# EAGLE board MM-Qwiic-Snap (EAGLE 9.6.2)
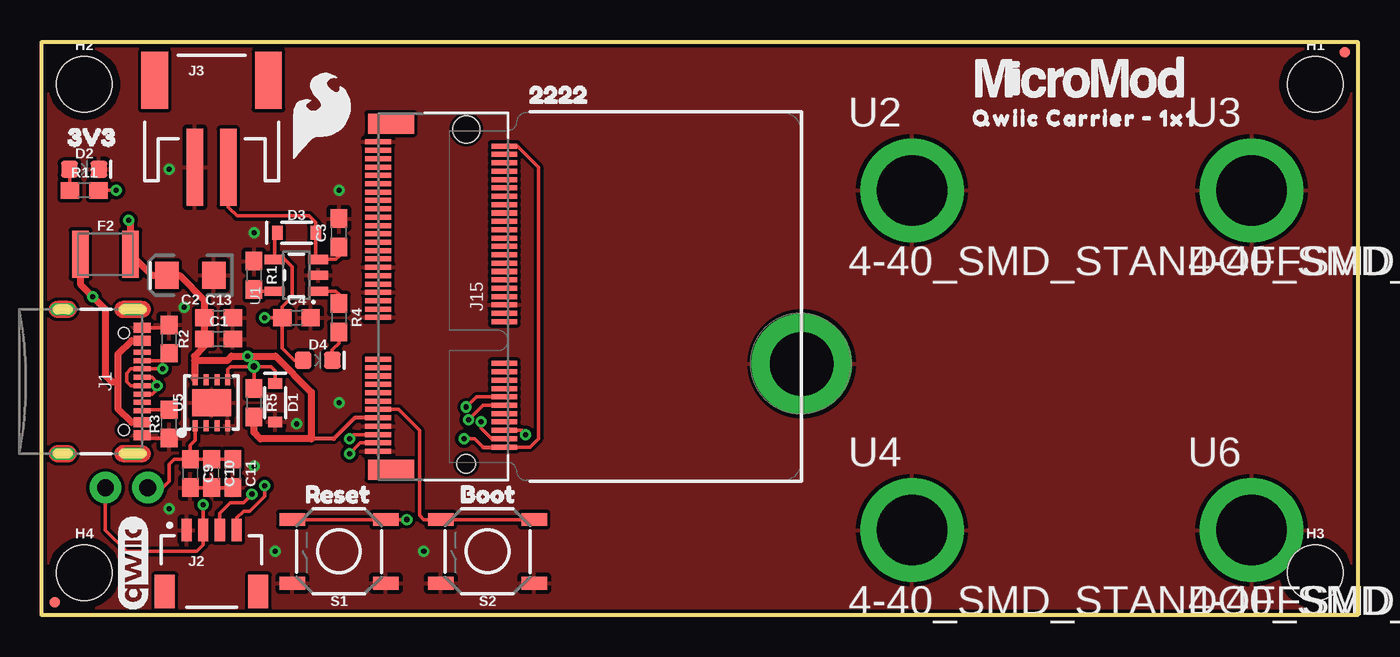
[diagram p0: board, top side]
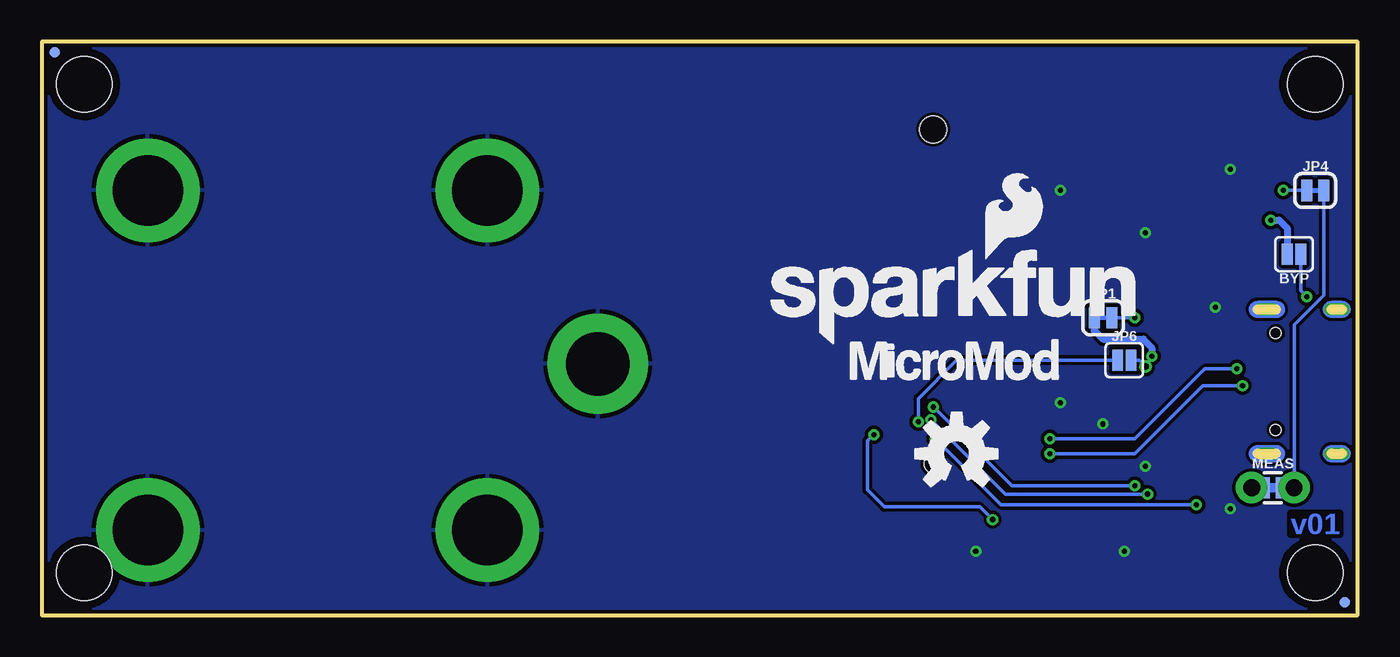
[diagram p1: board, bottom side, seen from below]

Size 78.74 x 34.29 mm. Coordinates in mm from the lower left corner, seen from the top.
Outline: 0,0 0,34.29 78.74,34.29 78.74,0 0,0
Copper layers (1*16): Top 0.035mm / dielectric 1.5mm / Bottom 0.035mm
Design rules "SparkFun-2-layer-TIGHT": minimum track width 7mil, minimum drill 15mil, track to track 7mil, track to pad 7mil, pad to pad 7mil, via to via 7mil, smd to smd 7mil, copper to edge 7mil, drill to drill 7mil, minimum pad ring 7mil, minimum via ring 7mil, stop-mask expansion 4mil, vias tented up to drill 25mil, thermal gap 10mil
Net classes: 0 default: width 0 mm, drill 0 mm; 1 power: width 0.762 mm
tRestrict: 4 lines

## Footprints (pad centres in the part's own frame; a part is rotated, then mirrored left to right if it is on the bottom)
SMT-JUMPER_2_NO_SILK = smd 0.635 x 1.27: 1 -0.406,0; 2 0.406,0
0603 = smd 1.1 x 1: 1 -0.85,0; 2 0.85,0
EIA3216 = smd 1.4 x 1.6: + 1.4,0; - -1.4,0
SOD-323 = smd 0.63 x 0.83: A 1.15,0; C -1.15,0
LED-0603 = smd 1 x 1: A -0.877,0; C 0.877,0
1210 = smd 1 x 2.8: 1 -1.5,0; 2 1.5,0
FIDUCIAL-MICRO = smd 0.635 x 0.635: 1 0,0
STAND-OFF = hole 3.302: 0,0
STAND-OFF-REFLOW-M2.5 = drill 3.8 pad 6: 1 0,0
USB-C-16P-2LAYER-PADS = smd 0.3 x 1: A5 -1.25,-0.34; A6 -0.25,-0.34; A7 0.25,-0.34; A8 1.25,-0.34; B5 1.75,-0.34; B6 0.75,-0.34; B7 -0.75,-0.34; B8 -1.75,-0.34 | smd 0.6 x 1: GND -3.225,-0.34; GND2 3.225,-0.34; VBUS1 -2.45,-0.34; VBUS2 2.45,-0.34 | drill 0.4 pad 0.6 long: SHLD1 -4.318,-0.915; SHLD2 4.318,-0.915; SHLD3 -4.318,-5.095; SHLD4 4.318,-5.095 | hole 0.65: -2.89,-1.445; 2.89,-1.445
JST04_1MM_RA = smd 0.6 x 1.35: 1 -1.5,0; 2 -0.5,0; 3 0.5,0; 4 1.5,0 | smd 1.2 x 2: NC1 2.8,-3.675; NC2 -2.8,-3.675
JST-2-SMD = smd 1 x 4.6: 1 -1,-3.7; 2 1,-3.7 | smd 1.6 x 3.4: NC1 -3.4,1.5; NC2 3.4,1.5
M.2-CONNECTOR-E = smd 0.3 x 1.55: 1 9.25,-5.275; 2 9,2.275; 3 8.75,-5.275; 4 8.5,2.275; 5 8.25,-5.275; 6 8,2.275; 7 7.75,-5.275; 8 7.5,2.275; 9 7.25,-5.275; 10 7,2.275; 11 6.75,-5.275; 12 6.5,2.275; 13 6.25,-5.275; 14 6,2.275; 15 5.75,-5.275; 16 5.5,2.275; 17 5.25,-5.275; 18 5,2.275; 19 4.75,-5.275; 20 4.5,2.275; 21 4.25,-5.275; 22 4,2.275; 23 3.75,-5.275; 32 1.5,2.275; 33 1.25,-5.275; 34 1,2.275; 35 0.75,-5.275; 36 0.5,2.275; 37 0.25,-5.275; 38 0,2.275; 39 -0.25,-5.275; 40 -0.5,2.275; 41 -0.75,-5.275; 42 -1,2.275; 43 -1.25,-5.275; 44 -1.5,2.275; 45 -1.75,-5.275; 46 -2,2.275; 47 -2.25,-5.275; 48 -2.5,2.275; 49 -2.75,-5.275; 50 -3,2.275; 51 -3.25,-5.275; 52 -3.5,2.275; 53 -3.75,-5.275; 54 -4,2.275; 55 -4.25,-5.275; 56 -4.5,2.275; 57 -4.75,-5.275; 58 -5,2.275; 59 -5.25,-5.275; 60 -5.5,2.275; 61 -5.75,-5.275; 62 -6,2.275; 63 -6.25,-5.275; 64 -6.5,2.275; 65 -6.75,-5.275; 66 -7,2.275; 67 -7.25,-5.275; 68 -7.5,2.275; 69 -7.75,-5.275; 70 -8,2.275; 71 -8.25,-5.275; 72 -8.5,2.275; 73 -8.75,-5.275; 74 -9,2.275; 75 -9.25,-5.275 | smd 1.2 x 2.75: A1 10.35,-4.5; A2 -10.35,-4.5 | hole 1.1: 10,0 | hole 1.6: -10,0
SMT-JUMPER_2_NC_TRACE_SILK = smd 0.66 x 1.27: 1 -0.521,0; 2 0.521,0
COMBO-JUMPER_2_NC_TRACE = smd 0.635 x 1.27: 1 -0.508,0; 2 0.508,0 | drill 1.016 pad 1.88: 3 -1.27,0; 4 1.27,0
TACTILE_SWITCH_SMD_5.2MM = smd 1.524 x 0.762: 1 -2.794,1.905; 2 2.794,1.905; 3 -2.794,-1.905; 4 2.794,-1.905
SOT23-5 = smd 0.55 x 1.2: 1 -0.95,-1.3; 2 0,-1.3; 3 0.95,-1.3; 4 0.95,1.3; 5 -0.95,1.3
4-40_1/8_SMD_STANDOFF = drill 4.216 pad 6.198: 1 0,0
UDFN-8 = smd 0.3 x 0.65: 1 -0.975,-1.375; 2 -0.325,-1.375; 3 0.325,-1.375; 4 0.975,-1.375; 5 0.975,1.375; 6 0.325,1.375; 7 -0.325,1.375; 8 -0.975,1.375 | smd 2.35 x 1.6: EP 0,0

## Placement (x,y rotation side)
BYP  JUMPER-SMT_2_NO_SILK  [SMT-JUMPER_2_NO_SILK]  3.81,21.59 180 bottom
C1  0.1uF  [0603]  10.58,16.51 0 top
C2  10uF  [EIA3216]  8.89,20.32 180 top
C3  4.7uF  [0603]  17.78,22.86 90 top
C4  4.7uF  [0603]  15.24,17.78 0 top
C9  10uF  [0603]  8.89,8.47 270 top
C10  1.0uF  [0603]  10.16,8.47 270 top
C11  0.22uF  [0603]  11.43,8.47 270 top
C13  0.22uF  [0603]  10.58,17.78 0 top
D1  3.3V  [SOD-323]  13.97,12.7 270 top
D2  RED  [LED-0603]  2.54,26.67 0 top
D3  3A/10V/280mV  [SOD-323]  15.24,22.86 0 top
D4  Yellow  [LED-0603]  16.51,15.24 0 top
F2  6V/2A  [1210]  3.81,21.59 0 top
FD1  FIDUCIALUFIDUCIAL  [FIDUCIAL-MICRO]  0.76,0.76 0 top
FD2  FIDUCIALUFIDUCIAL  [FIDUCIAL-MICRO]  77.98,33.66 0 top
FD3  FIDUCIALUFIDUCIAL  [FIDUCIAL-MICRO]  0.76,0.76 0 bottom
FD4  FIDUCIALUFIDUCIAL  [FIDUCIAL-MICRO]  77.98,33.66 0 bottom
FRAME1  FRAME-LEDGER  [CREATIVE_COMMONS]  8.89,-21.59 0 top  (outside the outline)
H1  STAND-OFF  [STAND-OFF]  76.2,31.75 0 top
H2  STAND-OFF  [STAND-OFF]  2.54,31.75 0 top
H3  STAND-OFF  [STAND-OFF]  76.2,2.54 0 top
H4  STAND-OFF  [STAND-OFF]  2.54,2.54 0 top
H5  STAND-OFF-REFLOW2.5MM_TALL  [STAND-OFF-REFLOW-M2.5]  45.47,15.03 0 top
J1  [USB-C-16P-2LAYER-PADS]  6.35,13.97 270 top
J2  QWIIC_RIGHT_ANGLE  [JST04_1MM_RA]  10.16,5.08 0 top
J3  [JST-2-SMD]  10.16,30.48 0 top
J15  MICROMOD-2222-C  [M.2-CONNECTOR-E]  25.4,19.05 270 top
JP1  JUMPER-SMT_2_NC_TRACE_SILK  [SMT-JUMPER_2_NC_TRACE_SILK]  15.24,17.78 0 bottom
JP4  3V3 LED  [SMT-JUMPER_2_NC_TRACE_SILK]  2.54,25.4 0 bottom
JP6  VE  [SMT-JUMPER_2_NO_SILK]  13.97,15.24 0 bottom
LOGO1  SFE_LOGO_NAME_FLAME.2_INCH  [SFE_LOGO_NAME_FLAME_.2]  24.13,19.05 0 bottom
LOGO2  QWIIC_LOGO_CONNECTOR  [QWIIC_5.5MM]  5.46,3.11 90 top
LOGO3  OSHW-LOGOM  [OSHW-LOGO-M]  24,9.65 0 bottom
MEAS  [COMBO-JUMPER_2_NC_TRACE]  5.08,7.62 0 bottom
R1  2.2k  [0603]  12.7,20.32 270 top
R2  5.1k  [0603]  7.62,16.51 270 top
R3  5.1k  [0603]  7.62,11.43 90 top
R4  1k  [0603]  17.78,17.78 270 top
R5  100k  [0603]  12.7,12.7 270 top
R11  1k  [0603]  2.54,25.4 0 top
S1  Reset  [TACTILE_SWITCH_SMD_5.2MM]  17.78,3.81 180 top
S2  BOOT  [TACTILE_SWITCH_SMD_5.2MM]  26.67,3.81 180 top
U1  MCP73831  [SOT23-5]  15.24,20.32 90 top
U2  4-40_SMD_STANDOFFSMD  [4-40_1/8_SMD_STANDOFF]  52.07,25.4 0 top
U3  4-40_SMD_STANDOFFSMD  [4-40_1/8_SMD_STANDOFF]  72.39,25.4 0 top
U4  4-40_SMD_STANDOFFSMD  [4-40_1/8_SMD_STANDOFF]  52.07,5.08 0 top
U5  AP7361C-33FGEUDFN-8  [UDFN-8]  10.16,12.7 0 top
U6  4-40_SMD_STANDOFFSMD  [4-40_1/8_SMD_STANDOFF]  72.39,5.08 0 top
U$1  [3V31]  0.64,28.57 0 top
U$2  [RESET3]  14.86,7.24 0 top
U$3  [QWIIC_CARRIER_#_1X1_0]  54.99,29.72 0 top
U$19  [BOOT2]  24.13,7.24 0 top
U$44  [SFE_LOGO_FLAME_.2]  16.76,29.84 0 top
U$55  [22229]  28.23,31.12 0 top
U$67  [MICROMOD_LOGO_.5]  62.1,32.13 0 top
U$68  [MICROMOD_LOGO_.5]  24.13,15.24 0 bottom

## Library data of the parts
BYP JP1 JP4 JP6 MEAS = SparkFun-Jumpers
C1 = SparkFun-Capacitors; PROD_ID: CAP-00810
C2 = SparkFun-Capacitors; PROD_ID: CAP-00811
C3 C4 = SparkFun-Capacitors; PROD_ID: CAP-14106
C9 = SparkFun-Capacitors; PROD_ID: CAP-11015
C10 = SparkFun-Capacitors; PROD_ID: CAP-00868
C11 C13 = SparkFun-Capacitors; PROD_ID: CAP-07822
D1 = SparkFun-DiscreteSemi; PROD_ID: DIO-11284
D2 = SparkFun-LED; PROD_ID: DIO-00819
D3 = SparkFun-DiscreteSemi; PROD_ID: DIO-14072
D4 = SparkFun-LED; PROD_ID: DIO-09003
F2 = SparkFun-Fuses; PROD_ID: RES-14313
FD1-FD4 FRAME1 LOGO1-LOGO3 U$44 = SparkFun-Aesthetics
H1-H4 = SparkFun-Hardware
H5 = SparkFun-Hardware; PROD_ID: HW-14899
J1 = SparkFun-Connectors; PROD_ID: CONN-14122
J2 = SparkFun-Connectors; PROD_ID: CONN-13694
J3 = SparkFun-Connectors; PROD_ID: CONN-11443; SF_ID: PRT-08612
J15 = SparkFun-MicroMod; PROD_ID: CONN-14877
R1 = SparkFun-Resistors; PROD_ID: RES-08272
R2 R3 = SparkFun-Resistors; PROD_ID: RES-12083
R4 R11 = SparkFun-Resistors; PROD_ID: RES-07856
R5 = SparkFun-Resistors; PROD_ID: RES-07828
S1 S2 = SparkFun-Switches; PROD_ID: SWCH-14139
U1 = SparkFun-IC-Power; PROD_ID: IC-09995
U2-U4 U6 = qwiic_carrier
U5 = SparkFun-IC-Power; PROD_ID: VREG-14094
U$1 = buzzard_labels (5)
U$2 U$55 = buzzard_labels (9)
U$3 = output
U$19 = buzzard_labels (10)
U$67 U$68 = SparkFun-MicroMod

## Nets
3.3V: J2.2 J15.2 J15.74 JP4.2 MEAS.2 MEAS.4
3.3V_EN: J15.4 JP6.1
5V: C4.1 D3.C D4.A JP1.2 U1.4
!BOOT!: J15.11 S2.3 S2.4
!RESET!: J15.6 S1.3 S1.4
GND: C1.2 C2.- C3.2 C4.2 C9.2 C10.2 C11.2 C13.2 D1.A D2.C H5.1 J1.GND J1.GND2 J2.1 J3.1 J15.1 J15.7 J15.33 J15.36 J15.39 J15.45 J15.75 R1.1 R2.1 R3.1 S1.1 S1.2 S2.1 S2.2 U1.2 U2.1 U3.1 U4.1 U5.4 U5.EP U6.1
I2C_SCL: J2.4 J15.14
I2C_SDA: J2.3 J15.12
N$1: C9.1 C10.1 C11.1 MEAS.1 MEAS.3 U5.1
N$2: R1.2 U1.5
N$3: R4.1 U1.1
N$4: JP4.1 R11.2
N$5: C3.1 D3.A J3.2 U1.3
N$6: D2.A R11.1
N$8: D4.C R4.2
N$10: J1.A5 R2.2
N$11: J1.B5 R3.2
USB_D+: J1.A6 J1.B6 J15.3
USB_D-: J1.A7 J1.B7 J15.5
V_USB: BYP.1 F2.1 J1.VBUS1 J1.VBUS2
VIN: BYP.2 C1.1 C2.+ C13.1 F2.2 J15.9 JP1.1 R5.2 U5.8
VREG_EN: D1.C JP6.2 R5.1 U5.5

## Tracks (layer width: path | path; a pad name or v marks a point on that pad's centre or on a via)
3.3V  (via drill 0.3)
  Top 0.203: MEAS.4 3.81,5.08 5.08,3.81 9.27,3.81 9.66,4.2 J2.2 v9.66,6.6 | v25.27,10.54 25.91,10.54 26.4,10.05 | J15.74 28.46,28.05 29.72,26.8 29.72,10.56 29.21,10.05 J15.2
  Top 0.229: v9.66,6.6 v9.65,6.6 | 26.4,10.05 J15.2
  Bottom 0.203: JP4.2 2.02,19.14 3.81,17.35 MEAS.4 MEAS.2 | v9.65,6.6 21.34,6.6 v25.27,10.54
3.3V_EN  (via drill 0.3)
  Top 0.203: J15.4 26.91,10.55 26.29,11.18 v26.29,11.56
  Bottom 0.203: JP6.1 24,15.24 26.29,12.95 v26.29,11.56
5V  (via drill 0.3)
  Top 0.203: D4.A 15.11,15.24 14.39,15.96 C4.1 | D3.C 13.94,22.71 U1.4 14.54,21.27 14.99,20.83 14.99,19.05 14.39,18.45 C4.1 | C4.1 v13.34,17.78
  Bottom 0.203: v13.34,17.78 JP1.2
!BOOT!
  Top 0.203: S2.3 S2.4 22.86,5.71 22.61,5.97 22.61,11.05 21.36,12.3 J15.11
!RESET!  (via drill 0.3)
  Top 0.203: S1.4 S1.3 v21.84,5.71 | 28.7,11.05 J15.6
  Top 0.229: v28.96,10.79 28.7,11.05
  Bottom 0.203: v21.84,5.71 22.61,6.48 28.32,6.48 29.34,7.49 29.34,10.41 v28.96,10.79
GND  (via drill 0.3)
  Top 0.203: J1.GND 7.46,17.2 R2.1 | J1.GND2 6.17,10.58 R3.1 | C9.2 C10.2 C11.2
  other vias: 22.86,3.81 13.97,3.81 7.62,6.35 12.7,8.89 17.78,12.7 15.24,11.43 8.51,18.41 17.78,25.4 12.7,22.86 7.62,26.67
  pour Top (isolate 0.203): 0,34.29 0,0 78.74,0 78.74,34.29
  pour Bottom (isolate 0.203): 0,34.29 0,0 78.74,0 78.74,34.29
I2C_SCL  (via drill 0.3)
  Top 0.203: J2.4 11.66,5.82 12.06,6.22 12.45,6.22 13.34,7.11 v13.34,7.73 | v25.4,12.45 25.42,12.45 26.02,13.05 J15.14
  Bottom 0.203: v13.34,7.73 20.69,7.73 v25.4,12.45
I2C_SDA  (via drill 0.3)
  Top 0.203: 10.64,5.1 10.64,6.1 11.27,6.73 12.06,6.73 v12.57,7.24 | v25.53,11.68 26.39,12.55 J15.12
  Top 0.229: J2.3 10.64,5.1
  Bottom 0.203: v12.57,7.24 21.08,7.24 v25.53,11.68
N$1
  Top 0.203: C9.1 C10.1 C11.1 | U5.1 9.19,10.46 8.89,10.16 C9.1 | MEAS.3 7.24,7.62 7.62,8 7.62,9.02 7.92,9.32 C9.1
  Bottom 0.203: MEAS.1 MEAS.3
N$2
  Top 0.203: U1.5 12.8,19.37 R1.2
N$3
  Top 0.203: U1.1 17.59,19.37 17.78,19.18 R4.1
N$4  (via drill 0.3)
  Top 0.203: R11.2 v4.45,25.4
  Bottom 0.203: v4.45,25.4 JP4.1
N$5
  Top 0.203: J3.2 11.16,24.4 11.68,23.88 16,23.88 16.39,23.49 D3.A 16.39,21.42 U1.3 17.59,21.27 17.78,21.46 C3.1
N$6
  Top 0.203: D2.A 1.66,25.43 R11.1
N$8
  Top 0.203: R4.2 17.78,16.27 17.39,15.88 D4.C
N$10
  Top 0.203: J1.A5 7.18,15.22 R2.2
N$11
  Top 0.203: J1.B5 6.07,12.28 R3.2
USB_D+  (via drill 0.3)
  Top 0.203: J1.A6 6.61,14.22 6.86,13.97 6.86,13.75 v6.89,13.72 6.89,13.49 6.6,13.21 6.02,13.21 J1.B6 | J15.3 19.06,10.3 v18.41,9.65
  Bottom 0.203: v18.41,9.65 13.34,9.65 9.27,13.72 v6.89,13.72
USB_D-  (via drill 0.3)
  Top 0.203: J1.A7 5.33,13.72 5.08,13.97 5.08,14.48 5.33,14.73 6,14.73 J1.B7 v7.23,14.72 v7.24,14.73 | v18.41,10.54 18.67,10.8 J15.5
  Bottom 0.203: v7.24,14.73 9.14,14.73 13.33,10.54 v18.41,10.54
V_USB  (via drill 0.3)
  Top 0.406: J1.VBUS2 5.37,11.52 4.57,12.32 4.57,13.97 | J1.VBUS1 5.37,16.42 4.57,15.62 4.57,13.97 | F2.1 2.31,19.79 v3.05,19.05 3.81,18.29 3.81,14.35 4.19,13.97 4.57,13.97
  Bottom 0.203: BYP.1 3.4,19.41 v3.05,19.05
VIN  (via drill 0.3)
  Top 0.203: C1.1 9.73,16.08 | 9.14,14.12 U5.8
  Top 0.229: J15.9 18.73,11.8 17.47,10.54 16.13,10.54
  Top 0.406: C1.1 C13.1 9.73,18.84 8.25,20.32 C2.+ 6.58,20.32 F2.2 5.31,23.52 v5.21,23.62 | 9.73,16.08 9.14,15.49 9.14,15.24 | 9.14,15.24 9.14,14.12 | 9.14,15.24 11.11,15.24 11.35,15.48 v12.32,15.48 13.98,15.48 16.13,13.34 16.13,10.54 13.08,10.54 12.7,10.92 R5.2
  Bottom 0.406: JP1.1 15.76,17.03 15.24,16.51 12.83,16.51 12.32,16 v12.32,15.48 | v5.21,23.62 4.7,23.62 4.22,23.14 BYP.2
VREG_EN  (via drill 0.38)
  Top 0.203: U5.5 11.13,14.69 11.3,14.86 v12.7,14.86 | v12.7,14.86 13.72,14.86 13.97,14.61 D1.C | R5.1 v12.7,14.86
  Bottom 0.203: v12.7,14.86 12.7,14.88 13.06,15.24 JP6.2

## Text on the board
Bottom: v01
Measures: in | in | in | in
Document: Selective Solder Nozzle Width: / 0.354331
tDocu: Priyanka Makin